# EAGLE board teensyMotors (EAGLE 9.1.3)
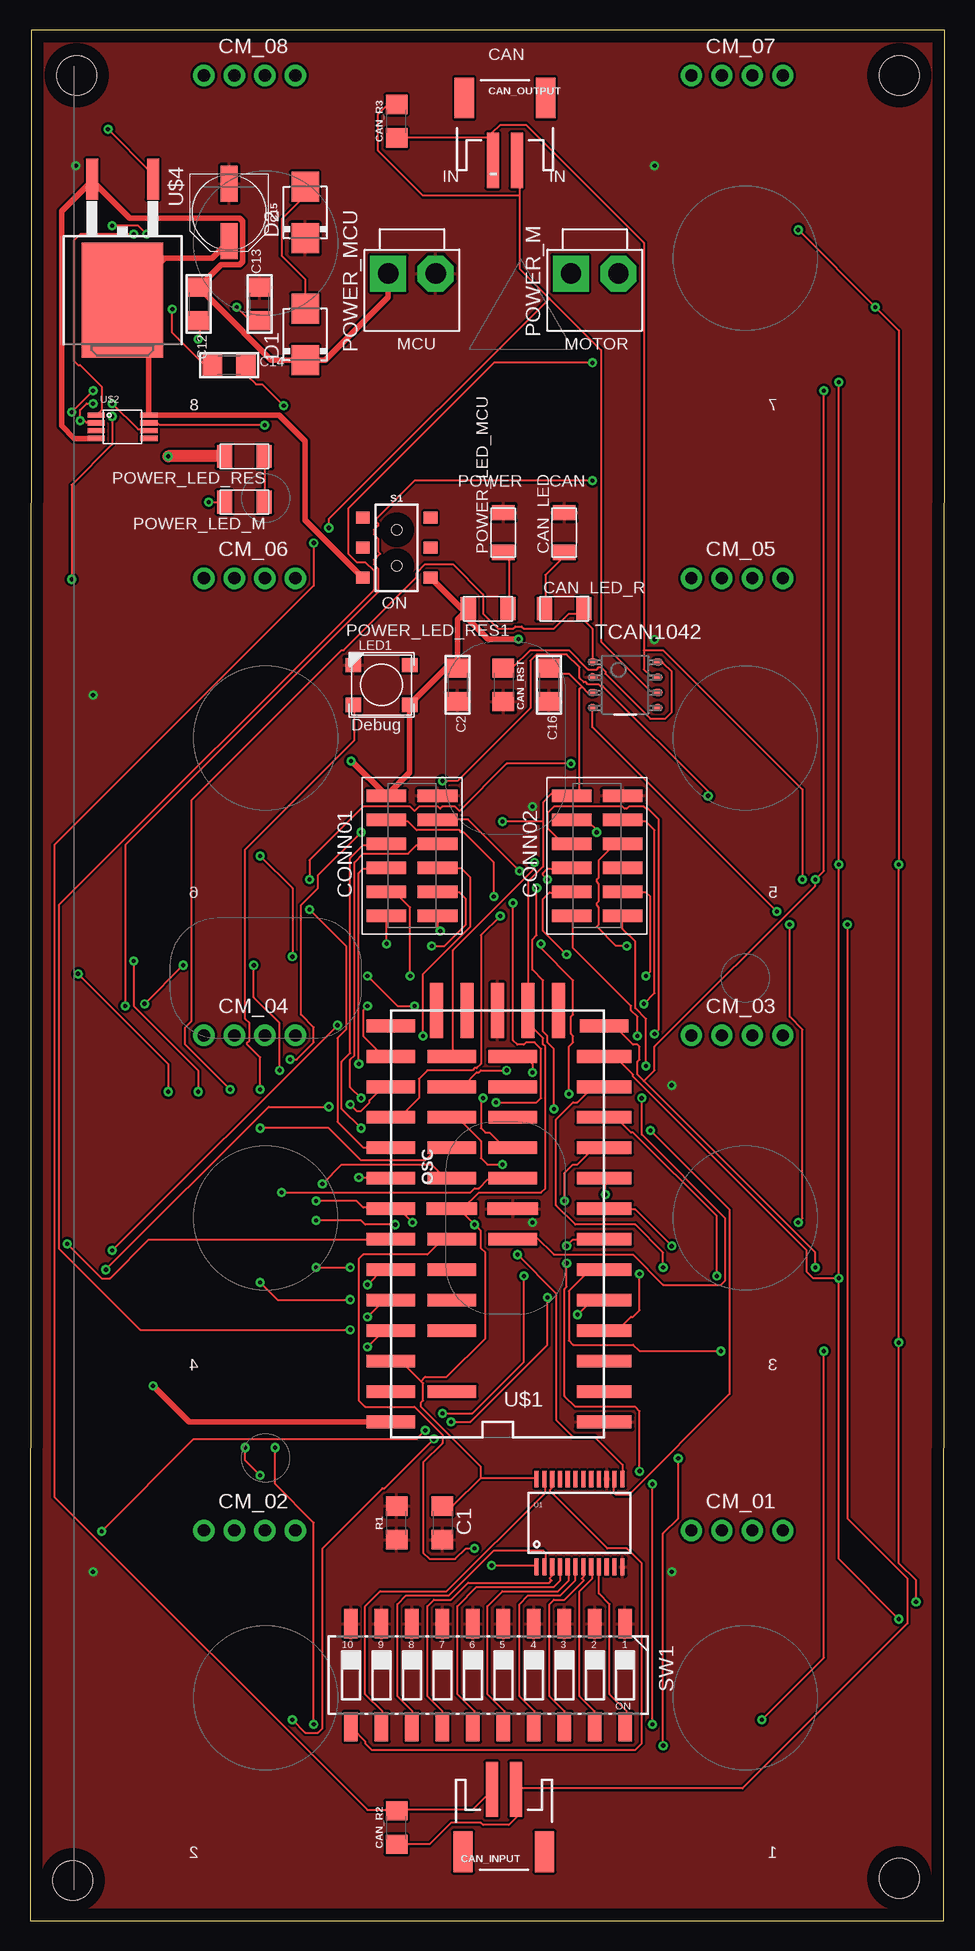
[diagram p0: board, top side]
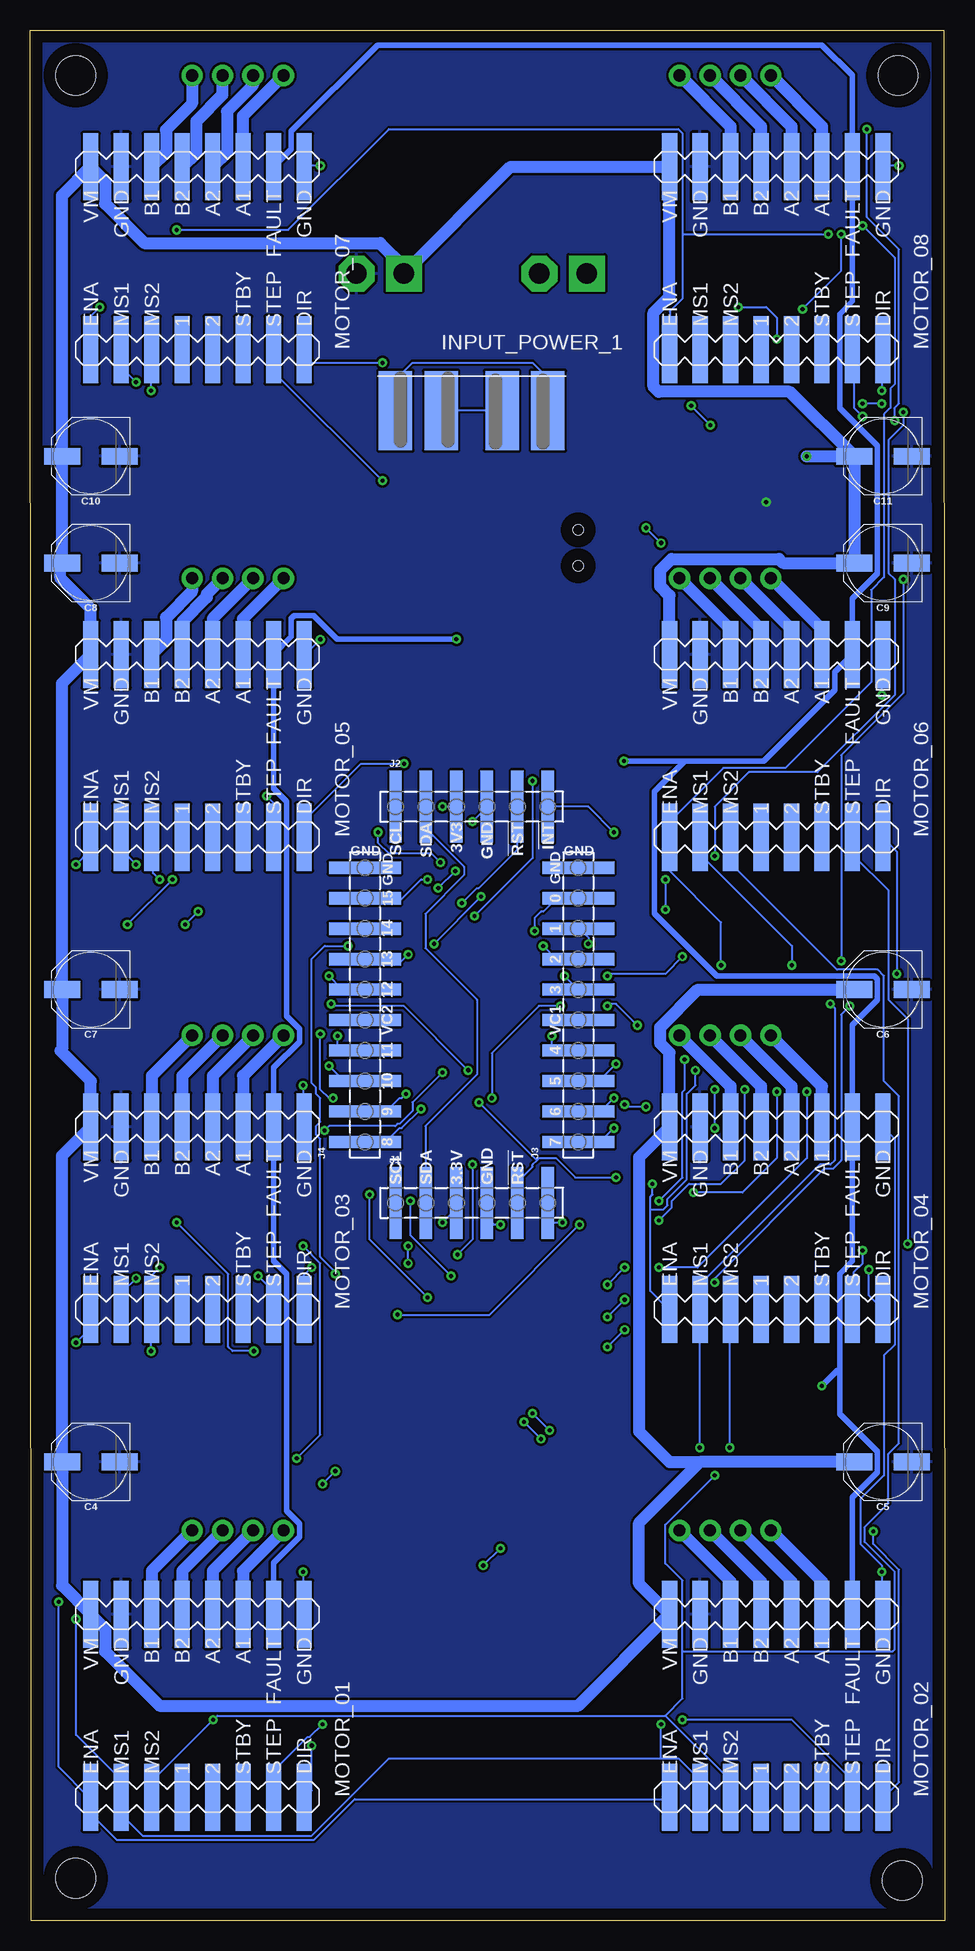
[diagram p1: board, bottom side, seen from below]

Size 76.28 x 157.61 mm. Coordinates in mm from the lower left corner, seen from the top.
Outline: 0,0 76.19,0 76.28,157.61 0.09,157.61 0,0
Copper layers (1*16): Top 0.035mm / dielectric 1.5mm / Bottom 0.035mm
Design rules "teensyMotors *": minimum track width 0.2mm, minimum drill 0.35mm, track to track 0.205mm, track to pad 0.205mm, pad to pad 0.205mm, via to via 0.205mm, smd to smd 6mil, copper to edge 40mil, drill to drill 6mil, minimum pad ring 10mil, minimum via ring 8mil, stop-mask expansion 4mil, vias tented up to drill 0mil, thermal gap 10mil
Net classes: 0 default: clearance 0.205 mm; 1 20z: width 2 mm

## Footprints (pad centres in the part's own frame; a part is rotated, then mirrored left to right if it is on the bottom)
C1206 = smd 1.6 x 1.8: 1 -1.4,0; 2 1.4,0
1206 = smd 1.6 x 1.8: 1 -1.4,0; 2 1.4,0
PANASONIC_D = smd 3 x 1.4: + 2.4,0; - -2.4,0
JST-2-SMD = smd 1 x 4.6: 1 -1,-3.7; 2 1,-3.7 | smd 1.6 x 3.4: NC1 -3.4,1.5; NC2 3.4,1.5
LED1206FAB = smd 1.27 x 1.905: 1 -1.651,0; 2 1.651,0
R1206FAB = smd 1.27 x 1.905: 1 -1.651,0; 2 1.651,0
1X04-CLEANBIG = drill 1.016 pad 1.778: 1 -3.81,0; 2 -1.27,0; 3 1.27,0; 4 3.81,0
TMMH-105-12 = smd 1.016 x 3.302: 1 -5.27,-2.134; 2 -5.27,2.134; 3 -3.27,-2.134; 4 -3.27,2.134; 5 -1.27,-2.134; 6 -1.27,2.134; 7 0.73,-2.134; 8 0.73,2.134; 9 2.73,-2.134; 10 2.73,2.134; 11 4.73,2.134; 12 4.73,-2.134
DO214AA = smd 2.5 x 2.3: A 2.15,0; C -2.15,0
MOLEX4015 = smd 2.794 x 6.604: GND_01 -2.54,3.81; GND_02 2.54,3.81; VCC_01 -6.35,3.81; VCC_02 6.35,3.81
1X06_SMD_MALE = smd 1.02 x 6: 1 0,0; 2 2.54,0; 3 5.08,0; 4 7.62,0; 5 10.16,0; 6 12.7,0
1X10_SMD_MALE = smd 1.02 x 6: 1 0,0; 2 2.54,0; 3 5.08,0; 4 7.62,0; 5 10.16,0; 6 12.7,0; 7 15.24,0; 8 17.78,0; 9 20.32,0; 10 22.86,0
LED5050_N = smd 1.3 x 1.2: 1-VDD 2.35,-1.65; 2-DOUT 2.35,1.65; 3-GND -2.35,1.65; 4-DIN -2.35,-1.65
DRV8880 = smd 5.588 x 1.27: 1 -7.62,1.27; 2 -7.62,-1.27; A1 7.62,-3.81; A2 7.62,-1.27; B1 7.62,3.81; B2 7.62,1.27; DIR -7.62,-8.89; ENA -7.62,8.89; FAULT 7.62,-6.35; GND_0 7.62,-8.89; GND_1 7.62,6.35; MS1 -7.62,6.35; MS2 -7.62,3.81; STBY -7.62,-3.81; STEP -7.62,-6.35; VM 7.62,8.89
B2P-VH = drill 1.7 pad 3 square: 1 -1.98,0 | drill 1.7 pad 3 octagon: 2 1.98,0
SWITCH_DPDT_SMD_AYZ0202 = smd 1 x 1.15: 1 -2.5,2.825; 2 0,2.825; 3 2.5,2.825; 4 -2.5,-2.825; 5 0,-2.825; 6 2.5,-2.825 | hole 0.85: 1.5,0; -1.5,0
STAND-OFF = hole 3.302: 0,0
CTS-219-10 = smd 1.13 x 2.44: 1 -11.43,-4.3; 2 -8.89,-4.3; 3 -6.35,-4.3; 4 -3.81,-4.3; 5 -1.27,-4.3; 6 1.27,-4.3; 7 3.81,-4.3; 8 6.35,-4.3; 9 8.89,-4.3; 10 11.43,-4.3; 11 11.43,4.3; 12 8.89,4.3; 13 6.35,4.3; 14 3.81,4.3; 15 1.27,4.3; 16 -1.27,4.3; 17 -3.81,4.3; 18 -6.35,4.3; 19 -8.89,4.3; 20 -11.43,4.3
D0008A_N = smd 0.85 x 0.6: 1 -2.725,1.905; 2 -2.725,0.635; 3 -2.725,-0.635; 4 -2.725,-1.905; 5 2.725,-1.905; 6 2.725,-0.635; 7 2.725,0.635; 8 2.725,1.905
SSOP24 = smd 0.348 x 1.397: 1 -3.575,-3.656; 2 -2.925,-3.656; 3 -2.275,-3.656; 4 -1.625,-3.656; 5 -0.975,-3.656; 6 -0.325,-3.656; 7 0.325,-3.656; 8 0.975,-3.656; 9 1.625,-3.656; 10 2.275,-3.656; 11 2.925,-3.656; 12 3.575,-3.656; 13 3.575,3.656; 14 2.925,3.656; 15 2.275,3.656; 16 1.625,3.656; 17 0.975,3.656; 18 0.325,3.656; 19 -0.325,3.656; 20 -0.975,3.656; 21 -1.625,3.656; 22 -2.275,3.656; 23 -2.925,3.656; 24 -3.575,3.656
TEENSY_3.0-3.2_ALL_PINS_&_PADS_SMD = smd 4.572 x 1.067: 0 -8.89,13.97; 1 -8.89,11.43; 2 -8.89,8.89; 3 -8.89,6.35; 4 -8.89,3.81; 5 -8.89,1.27; 6 -8.89,-1.27; 7 -8.89,-3.81; 8 -8.89,-6.35; 9 -8.89,-8.89; 10 -8.89,-11.43; 11 -8.89,-13.97; GND -8.89,16.51 | smd 4.064 x 1.067: 3.3V 8.89,11.43; 12 -8.89,-16.51; 13 8.89,-16.51; 14/A0 8.89,-13.97; 15/A1 8.89,-11.43; 16/A2 8.89,-8.89; 17/A3 8.89,-6.35; 18/A4 8.89,-3.81; 19/A5 8.89,-1.27; 20/A6 8.89,1.27; 21/A7 8.89,3.81; 22/A8 8.89,6.35; 23/A9 8.89,8.89; 24 -1.27,-3.81; 25 -1.27,-6.35; 26 -1.27,-8.89; 27 -1.27,-11.43; 28 -1.27,-13.97; 29 3.81,-13.97; 30 3.81,-11.43; 31 3.81,-8.89; 32 3.81,-6.35; 33 3.81,-3.81; A10 3.81,6.35; A11 3.81,3.81; A12 -1.27,1.27; A13 3.81,1.27; AGND 8.89,13.97; AREF 3.81,8.89; VIN 8.89,16.51; VUSB 3.81,13.97 | smd 1.067 x 4.572: 3.3V1 -2.54,-17.78; GND1 0,-17.78; PGM 2.54,-17.78; RESET/DAC 5.08,-17.78; VBAT -5.08,-17.78 | smd 4.191 x 1.067: 3.3V2 3.81,-1.27; GND2 -1.27,-1.27
VSSOP(8) = smd 1.435 x 0.445: ANODE -2.2,-1.05; CATHODE 2.2,0.9; GDRIVE 2.2,-0.4; GPD -2.2,0.25; NC@1 -2.2,-0.4; NC@2 2.2,-1.05; VCAPH 2.2,0.25; VCAPL -2.2,0.9
TO263-3 = smd 1 x 3.4: 1 -2.54,-9.14; 3 2.54,-9.14 | smd 6.8 x 9.6: 4 0,0.96

## Placement (x,y rotation side)
C1  0.1uF  [C1206]  34.38,33.17 270 top
C2  [1206]  35.65,103.02 270 top
C4  100uF  [PANASONIC_D]  71.21,38.25 180 bottom
C5  100uF  [PANASONIC_D]  5.17,38.25 180 bottom
C6  100uF  [PANASONIC_D]  5.17,77.62 180 bottom
C7  100uF  [PANASONIC_D]  71.21,77.62 180 bottom
C8  100uF  [PANASONIC_D]  71.21,113.18 180 bottom
C9  100uF  [PANASONIC_D]  5.17,113.18 180 bottom
C10  100uF  [PANASONIC_D]  71.21,122.07 180 bottom
C11  100uF  [PANASONIC_D]  5.17,122.07 180 bottom
C12  [1206]  14.06,134.77 270 top
C13  [1206]  19.14,134.77 90 top
C14  [1206]  16.6,129.69 0 top
C15  100uF  [PANASONIC_D]  16.6,142.39 270 top
C16  [1206]  43.27,103.02 270 top
CAN_INPUT  [JST-2-SMD]  39.5,7.25 180 top
CAN_LED  LEDFAB1206  [LED1206FAB]  44.54,115.72 90 top
CAN_LED_R  500  [R1206FAB]  44.54,109.37 0 top
CAN_OUTPUT  [JST-2-SMD]  39.6,150.44 0 top
CAN_R2  120ohm  [1206]  30.57,7.77 90 top
CAN_R3  120ohm  [1206]  30.57,150.01 90 top
CAN_RST  10K  [1206]  39.46,103.02 270 top
CM_01  1X04_SMD_STRAIGHT_COMBO  [1X04-CLEANBIG]  58.96,32.53 0 top
CM_02  1X04_SMD_STRAIGHT_COMBO  [1X04-CLEANBIG]  18.32,32.53 0 top
CM_03  1X04_SMD_STRAIGHT_COMBO  [1X04-CLEANBIG]  58.96,73.81 0 top
CM_04  1X04_SMD_STRAIGHT_COMBO  [1X04-CLEANBIG]  18.32,73.81 0 top
CM_05  1X04_SMD_STRAIGHT_COMBO  [1X04-CLEANBIG]  58.96,111.91 0 top
CM_06  1X04_SMD_STRAIGHT_COMBO  [1X04-CLEANBIG]  18.32,111.91 0 top
CM_07  1X04_SMD_STRAIGHT_COMBO  [1X04-CLEANBIG]  58.96,153.82 0 top
CM_08  1X04_SMD_STRAIGHT_COMBO  [1X04-CLEANBIG]  18.32,153.82 0 top
CONN01  TMMH-105-12  [TMMH-105-12]  31.84,89.05 90 top
CONN02  TMMH-105-12  [TMMH-105-12]  47.29,89.05 90 top
D1  S2M  [DO214AA]  22.95,132.23 90 top
D2  S2M  [DO214AA]  22.95,142.39 90 top
INPUT_POWER_1  MOLEX4015  [MOLEX4015]  39.46,122.07 0 bottom
J1  [1X06_SMD_MALE]  45.81,59.84 0 bottom
J2  [1X06_SMD_MALE]  45.81,92.86 0 bottom
J3  [1X10_SMD_MALE]  30.57,64.92 90 bottom
J4  [1X10_SMD_MALE]  48.35,64.92 90 bottom
LED1  [LED5050_N]  29.3,103.02 0 top
MOTOR_01  DRV8880  [DRV8880]  62.32,17.93 90 bottom
MOTOR_02  DRV8880  [DRV8880]  14.06,17.93 90 bottom
MOTOR_03  DRV8880  [DRV8880]  62.32,58.57 90 bottom
MOTOR_04  DRV8880  [DRV8880]  14.06,58.57 90 bottom
MOTOR_05  DRV8880  [DRV8880]  62.32,97.94 90 bottom
MOTOR_06  DRV8880  [DRV8880]  14.06,97.94 90 bottom
MOTOR_07  DRV8880  [DRV8880]  62.32,138.58 90 bottom
MOTOR_08  DRV8880  [DRV8880]  14.06,138.58 90 bottom
POWER_LED_M  LEDFAB1206  [LED1206FAB]  17.87,118.26 180 top
POWER_LED_MCU  LEDFAB1206  [LED1206FAB]  39.46,115.72 90 top
POWER_LED_RES  500  [R1206FAB]  17.87,122.07 180 top
POWER_LED_RES1  500  [R1206FAB]  38.19,109.37 180 top
POWER_M  B2P-VH  [B2P-VH]  47.08,137.31 0 top
POWER_MCU  B2P-VH  [B2P-VH]  31.84,137.31 0 top
R1  [1206]  30.57,33.17 90 top
S1  [SWITCH_DPDT_SMD_AYZ0202]  30.57,114.45 270 top
STANDOFF5  STAND-OFF  [STAND-OFF]  72.48,3.53 0 top
STANDOFF6  STAND-OFF  [STAND-OFF]  3.57,3.36 0 top
STANDOFF7  STAND-OFF  [STAND-OFF]  72.48,153.82 0 top
STANDOFF8  STAND-OFF  [STAND-OFF]  3.9,153.82 0 top
SW1  219-10  [CTS-219-10]  38.19,20.47 180 top
TCAN1042  Value  [D0008A_N]  49.62,103.02 0 top
U1  MUX-74HC4067  [SSOP24]  45.81,33.17 0 top
U$1  TEENSY_3.1-3.2_ALL_PINS&PADS_SMD  [TEENSY_3.0-3.2_ALL_PINS_&_PADS_SMD]  38.98,58.08 180 top
U$2  [VSSOP(8)]  7.71,124.61 0 top
U$4  [TO263-3]  7.71,136.04 180 top

## Library data of the parts
C1 CM_01-CM_08 = adafruit
C2 C12-C14 C16 = microbuilder
C4-C11 C15 = SparkFun-Capacitors; PROD_ID: CAP-12547
CAN_INPUT CAN_OUTPUT = SparkFun-Connectors; PROD_ID: CONN-11443
CAN_LED CAN_LED_R POWER_LED_M POWER_LED_MCU POWER_LED_RES POWER_LED_RES1 = fab
CAN_R2 CAN_R3 CAN_RST R1 = SparkFun-Resistors
CONN01 CONN02 = TMMH-105-XX-XX-DV
D1 D2 = s2x_10; MF: Fairchild; MPN: S2M; OC_FARNELL: 9843876; OC_NEWARK: 58K9553
INPUT_POWER_1 = MOLEX4015
J1 J2 = SparkFun-Connectors; PROD_ID: CONN-11293
J3 J4 = SparkFun-Connectors; PROD_ID: CONN-11291
LED1 = SK6812
MOTOR_01-MOTOR_08 = STSPIN220
POWER_M POWER_MCU = con-JST VH
S1 = SparkFun-Switches; PROD_ID: SWCH-08179; SF_SKU: COM-00597; SPICEPREFIX: X
STANDOFF5-STANDOFF8 = SparkFun-Electromechanical
SW1 = switch-dil; MF: SLI (CML/IDI); MPN: 219-10PK; OC_FARNELL: unknown; OC_NEWARK: 19M0224
TCAN1042 = TCAN1042DRQ1; MANUFACTURER: Texas Instruments; PARTNUMBER: TCAN1042DRQ1; REFDES: RefDes; TYPE: TYPE
U1 = SparkFun
U$1 = Teensy_3_and_LC_Series_Boards_v1.4
U$2 = 1zac; MPN: LM74610-Q1
U$4 = v-reg-2

## Nets
3.3V: C1.1 C16.1 CONN02.11 J1.4 J2.4 TCAN1042.3 U1.24 U$1.3.3V U$1.3.3V1 U$1.3.3V2
AGND: U$1.AGND
AREF: U$1.AREF
C0: SW1.20 U1.9
C1: SW1.19 U1.8
C2: SW1.18 U1.7
C3: SW1.17 U1.6
C4: SW1.16 U1.5
C5: SW1.15 U1.4
C6: SW1.14 U1.3
C7: SW1.13 U1.2
C8: SW1.12 U1.23
C9: SW1.11 U1.22
CAN_H: CAN_INPUT.1 CAN_OUTPUT.1 CAN_R2.1 CAN_R3.1 TCAN1042.7
CAN_L: CAN_INPUT.2 CAN_OUTPUT.2 CAN_R2.2 CAN_R3.2 TCAN1042.6
CAN_RX [20z]: TCAN1042.4 U$1.4
CAN_TX [20z]: CAN_LED_R.2 TCAN1042.1 U$1.3
GND_IN: INPUT_POWER_1.GND_01 INPUT_POWER_1.GND_02
GND_M: C4.- C5.- C6.- C7.- C8.- C9.- C10.- C11.- MOTOR_01.GND_1 MOTOR_02.GND_1 MOTOR_03.GND_1 MOTOR_04.GND_1 MOTOR_05.GND_1 MOTOR_06.GND_1 MOTOR_07.GND_1 MOTOR_08.GND_1 POWER_LED_M.2 POWER_M.2
GND_MCU: C1.2 C2.2 C13.2 C15.- C16.2 CAN_LED.2 CAN_RST.2 CONN01.12 CONN02.12 D2.C J1.3 J2.3 LED1.3-GND MOTOR_01.GND_0 MOTOR_02.GND_0 MOTOR_03.GND_0 MOTOR_04.GND_0 MOTOR_05.GND_0 MOTOR_06.GND_0 MOTOR_07.GND_0 MOTOR_08.GND_0 POWER_LED_MCU.2 POWER_MCU.2 R1.1 R1.2 SW1.1 SW1.2 SW1.3 SW1.4 SW1.5 SW1.6 SW1.7 SW1.8 SW1.9 SW1.10 TCAN1042.2 U1.12 U1.15 U$1.GND U$1.GND1 U$1.GND2
I2CM_0: CONN01.1 J3.9
I2CM_1: CONN01.2 J3.8
I2CM_2: CONN01.3 J3.7
I2CM_3: CONN01.4 J3.6
I2CM_4: CONN01.5 J3.4
I2CM_5: CONN01.6 J3.3
I2CM_6: CONN01.7 J3.2
I2CM_7: CONN01.8 J3.1
I2CM_8: CONN01.9 J4.1
I2CM_9: CONN01.10 J4.2
I2CM_10: CONN02.1 J4.3
I2CM_11: CONN02.2 J4.4
I2CM_12: CONN02.3 J4.6
I2CM_13: CONN02.4 J4.7
I2CM_14: J4.8
I2CM_15: CONN02.6 J4.9
IC2M_14: CONN02.5
LED_DEBUG: LED1.4-DIN U$1.32
MA1_01: CM_01.1 MOTOR_01.A1
MA1_02: CM_02.1 MOTOR_02.A1
MA1_03: CM_03.1 MOTOR_03.A1
MA1_04: CM_04.1 MOTOR_04.A1
MA1_05: CM_05.1 MOTOR_05.A1
MA1_06: CM_06.1 MOTOR_06.A1
MA1_07: CM_07.1 MOTOR_07.A1
MA1_08: CM_08.1 MOTOR_08.A1
MA2_01: CM_01.2 MOTOR_01.A2
MA2_02: CM_02.2 MOTOR_02.A2
MA2_03: CM_03.2 MOTOR_03.A2
MA2_04: CM_04.2 MOTOR_04.A2
MA2_05: CM_05.2 MOTOR_05.A2
MA2_06: CM_06.2 MOTOR_06.A2
MA2_07: CM_07.2 MOTOR_07.A2
MA2_08: CM_08.2 MOTOR_08.A2
MB1_01: CM_01.4 MOTOR_01.B1
MB1_02: CM_02.4 MOTOR_02.B1
MB1_03: CM_03.4 MOTOR_03.B1
MB1_04: CM_04.4 MOTOR_04.B1
MB1_05: CM_05.4 MOTOR_05.B1
MB1_06: CM_06.4 MOTOR_06.B1
MB1_07: CM_07.4 MOTOR_07.B1
MB1_08: CM_08.4 MOTOR_08.B1
MB2_01: CM_01.3 MOTOR_01.B2
MB2_02: CM_02.3 MOTOR_02.B2
MB2_03: CM_03.3 MOTOR_03.B2
MB2_04: CM_04.3 MOTOR_04.B2
MB2_05: CM_05.3 MOTOR_05.B2
MB2_06: CM_06.3 MOTOR_06.B2
MB2_07: CM_07.3 MOTOR_07.B2
MB2_08: CM_08.3 MOTOR_08.B2
MDIR_01 [20z]: MOTOR_01.DIR U$1.6
MDIR_02 [20z]: MOTOR_02.DIR U$1.8
MDIR_03 [20z]: MOTOR_03.DIR U$1.10
MDIR_04 [20z]: MOTOR_04.DIR U$1.15/A1
MDIR_05 [20z]: MOTOR_05.DIR U$1.17/A3
MDIR_06 [20z]: MOTOR_06.DIR U$1.21/A7
MDIR_07 [20z]: MOTOR_07.DIR U$1.23/A9
MDIR_08: MOTOR_08.DIR U$1.25
MENABLE: MOTOR_01.ENA MOTOR_02.ENA MOTOR_03.ENA MOTOR_04.ENA MOTOR_05.ENA MOTOR_06.ENA MOTOR_07.ENA MOTOR_08.ENA U$1.33
MMS1 [20z]: MOTOR_01.MS1 MOTOR_02.MS1 MOTOR_03.MS1 MOTOR_04.MS1 MOTOR_05.MS1 MOTOR_06.MS1 MOTOR_07.MS1 U$1.11
MMS2 [20z]: MOTOR_01.MS2 MOTOR_02.MS2 MOTOR_03.MS2 MOTOR_04.MS2 MOTOR_05.MS2 MOTOR_06.MS2 MOTOR_07.MS2 U$1.12
MSS1: MOTOR_08.MS1
MSS2: MOTOR_08.MS2
MSTEP_01 [20z]: MOTOR_01.STEP U$1.5
MSTEP_02 [20z]: MOTOR_02.STEP U$1.7
MSTEP_03 [20z]: MOTOR_03.STEP U$1.9
MSTEP_04 [20z]: MOTOR_04.STEP U$1.14/A0
MSTEP_05 [20z]: MOTOR_05.STEP U$1.16/A2
MSTEP_06 [20z]: MOTOR_06.STEP U$1.20/A6
MSTEP_07 [20z]: MOTOR_07.STEP U$1.22/A8
MSTEP_08 [20z]: MOTOR_08.STEP U$1.24
MUS_S1: U1.11
MUX_INT: J1.1
MUX_OSCIO: J2.1
MUX_RESET: J1.2 J2.2
MUX_S0: U$1.26
MUX_S1: U$1.27
MUX_S2: U1.14 U$1.28
MUX_S3: U1.13 U$1.31
MUX_SCL [20z]: J1.6 J2.6 U$1.19/A5
MUX_SDA [20z]: J1.5 J2.5 U$1.18/A4
MUX_SIG [20z]: U1.1 U$1.A13
MUX_SO: U1.10
N$1: POWER_LED_M.1 POWER_LED_RES.1
N$2: C14.2 U$2.VCAPH
N$3: TCAN1042.5
N$4: U$2.GDRIVE U$2.GPD U$4.1
N$5: C14.1 U$2.VCAPL
N$6: CAN_RST.1 TCAN1042.8
N$7: POWER_LED_MCU.1 POWER_LED_RES1.1
N$9: C12.2 C13.1
N$11: U$1.13
N$12: D1.A D2.A
N$13: LED1.2-DOUT
N$193: CAN_LED.1 CAN_LED_R.1
NEO_PIXEL [20z]: CONN02.7 U$1.2
REG_5V: C15.+ S1.6 U$2.CATHODE U$4.4
S_SCL: CONN02.10 U$1.29
S_SDA: CONN02.9 U$1.30
S_SEN_01: CONN02.8 U$1.A12
VBAT: U$1.VBAT
VCC1: J3.5
VCC2: J4.5
VCC_5V: C2.1 CONN01.11 LED1.1-VDD MOTOR_01.FAULT MOTOR_02.FAULT MOTOR_03.FAULT MOTOR_04.FAULT MOTOR_05.FAULT MOTOR_06.FAULT MOTOR_07.FAULT MOTOR_08.FAULT POWER_LED_RES1.2 S1.3 U$1.VIN
VCC_IN: INPUT_POWER_1.VCC_01 INPUT_POWER_1.VCC_02
VCC_M: C4.+ C5.+ C6.+ C7.+ C8.+ C9.+ C10.+ C11.+ MOTOR_01.VM MOTOR_02.VM MOTOR_03.VM MOTOR_04.VM MOTOR_05.VM MOTOR_06.VM MOTOR_07.VM MOTOR_08.VM POWER_LED_RES.2 POWER_M.1
VCC_MCU: C12.1 D1.C POWER_MCU.1 U$2.ANODE U$4.3
VUSB: U$1.VUSB

## Tracks (layer width: path | path; a pad name or v marks a point on that pad's centre or on a via)
3.3V  (via drill 0.35)
  Top 0.152: 46,102.88 44.93,103.95 43.68,103.95 43.32,104.31 C16.1 | 46,102.88 46.54,102.34 46.89,102.34 TCAN1042.3 | 46,102.88 45.82,102.7 45.82,94.3 45.29,93.77 CONN02.11 45.11,93.94 43.5,93.94 42.78,93.23 42.78,91.62 | 42.78,91.62 42.78,87.87 41.53,86.62 41.53,75.9 U$1.3.3V1 41.53,75.72 41.53,74.82 42.78,73.57 42.78,73.04 42.96,72.86 42.96,61.07 42.61,60.71 37.42,60.71 35.99,59.28 35.81,59.28 | 42.78,91.62 v39.39,91.62 | 35.81,59.28 35.28,59.28 U$1.3.3V2 35.81,59.28 | 35.81,59.28 v37.07,58.03 37.6,57.49 37.6,56.06 37.96,55.7 37.96,48.56 34.74,45.34 32.96,45.34 32.6,44.98 | 37.6,36.94 42.07,36.94 U1.24 | 37.6,36.94 35.28,34.62 34.38,34.62 C1.1 | 32.6,44.98 32.78,44.8 32.78,43.37 32.6,43.2 32.6,42.84 37.6,37.83 37.6,36.94 | 32.6,44.98 30.99,46.59 30.1,46.59 U$1.3.3V
  Bottom 0.152: v39.39,91.62 38.32,92.69 J2.4 | v37.07,58.03 37.6,58.03 38.14,58.56 38.14,59.81 J1.4
C0
  Top 0.152: U1.9 47.43,29.43 47.43,27.29 48.32,26.4 48.32,18.89 49.75,17.46 49.75,16.21 SW1.20
C1
  Top 0.152: U1.8 46.89,29.43 46.89,28.54 45.82,27.47 45.82,18.71 47.07,17.46 47.07,16.21 SW1.19
C2
  Top 0.152: U1.7 46.18,29.43 46.18,28.72 46,28.54 46.18,28.36 44.57,26.75 43.68,26.75 43.32,26.4 43.32,18.71 44.57,17.46 44.57,16.21 SW1.18
C3
  Top 0.152: U1.6 45.46,29.43 45.46,28.36 44.21,27.11 41.53,27.11 40.82,26.4 40.82,18.71 42.07,17.46 42.07,16.21 SW1.17
C4
  Top 0.152: U1.5 44.93,29.43 44.93,28.36 44.03,27.47 39.39,27.47 38.14,26.22 38.14,18.89 39.57,17.46 39.57,16.21 SW1.16
C5
  Top 0.152: U1.4 44.21,29.43 44.21,28.36 43.68,27.83 37.24,27.83 35.64,26.22 35.64,18.89 37.07,17.46 37.07,16.21 SW1.15
C6
  Top 0.152: U1.3 43.5,29.43 43.5,28.72 43.32,28.54 43.5,28.36 43.32,28.18 36.53,28.18 35.1,26.75 33.67,26.75 33.13,26.22 33.13,18.71 34.38,17.46 34.38,16.21 SW1.14
C7
  Top 0.152: U1.2 42.96,29.61 42.96,30.69 42.78,30.86 38.67,30.86 34.92,27.11 31.35,27.11 30.63,26.4 30.63,18.71 31.88,17.46 31.88,16.21 SW1.13
C8
  Top 0.152: U1.23 42.96,36.76 42.96,35.69 34.74,27.47 29.2,27.47 27.95,26.22 27.95,18.89 29.38,17.46 29.38,16.21 SW1.12
C9
  Top 0.152: U1.22 43.5,36.76 43.5,36.05 43.32,35.87 48.14,31.04 49.75,31.04 51,29.79 51,14.78 50.47,14.25 28.49,14.25 27.95,14.78 27.95,14.96 26.88,16.03 SW1.11
CAN_H  (via drill 0.35)
  Top 0.152: CAN_R2.1 30.63,6.38 33.31,6.38 35.1,8.17 37.6,8.17 37.78,7.99 39.92,7.99 40.64,8.71 40.64,10.85 CAN_INPUT.1 40.64,11.03 59.4,11.03 73.16,24.79 73.16,28.54 68.16,33.55 v68.16,83.05 | 51.18,105.92 51.18,139.87 41.35,149.7 39.21,149.7 38.49,148.99 38.49,148.63 | 51.18,105.92 51.18,104.31 51.72,103.77 52.25,103.77 TCAN1042.7 | 38.49,148.63 38.49,146.84 CAN_OUTPUT.1 38.49,148.63 | 38.49,148.63 30.63,148.63 CAN_R3.1 | v64.41,86.8 64.41,94.3 52.79,105.92 51.18,105.92
  Bottom 0.152: v64.41,86.8 v68.16,83.05
CAN_L  (via drill 0.35)
  Top 0.152: CAN_INPUT.2 38.49,10.85 36.89,9.24 30.63,9.24 CAN_R2.2 30.45,9.24 28.13,9.24 2.04,35.33 2.04,89.66 23.66,111.28 v23.66,114.85 | 43.32,135.23 40.82,137.73 40.82,143.8 | 43.32,135.23 47.61,130.94 47.61,106.63 51.72,102.52 52.25,102.52 TCAN1042.6 | 40.82,143.8 40.82,146.48 40.64,146.66 CAN_OUTPUT.2 | 40.82,143.8 32.78,143.8 29.02,147.56 29.02,150.59 29.74,151.31 30.45,151.31 CAN_R3.2 | v24.91,116.1 24.91,116.82 43.32,135.23
  Bottom 0.152: v24.91,116.1 v23.66,114.85
CAN_RX  (via drill 0.35)
  Top 0.152: v62.26,84.12 46.89,99.48 46.89,101.09 TCAN1042.4 | v63.33,83.05 63.33,75.36 64.41,74.29 64.41,58.56 v64.05,58.21 | v57.62,47.48 50.83,47.48 50.29,48.02 45.29,48.02 44.93,48.38 44.93,52.49 46.72,54.27 47.79,54.27 U$1.4
  Bottom 0.152: v63.33,83.05 v62.26,84.12 | v64.05,58.21 59.76,53.92 59.76,47.84 59.4,47.48 v57.62,47.48
CAN_TX  (via drill 0.35)
  Top 0.152: 46.18,108.96 46.18,109.31 CAN_LED_R.2 46.18,108.96 | 46.18,108.96 46.18,108.42 46.89,107.7 46.89,105.02 TCAN1042.1 | 46.18,108.96 44.93,108.96 43.68,107.7 41.18,107.7 41,107.88 40.46,107.88 40.28,107.7 39.03,107.7 37.78,108.96 37.78,110.56 35.28,113.07 32.96,113.07 32.24,112.35 32.24,111.99 26.17,105.92 25.99,105.92 13.48,93.41 13.48,75 12.94,74.47 12.94,73.04 v16.69,69.28 | v23.84,58.38 27.6,58.38 27.95,58.03 v30.45,58.03 | v45.64,50.52 46.72,51.59 47.79,51.59 U$1.3
  Bottom 0.152: v16.69,69.28 16.69,63.39 18.66,61.42 21.34,61.42 22.77,59.99 22.77,59.46 v23.84,58.38 | v30.45,58.03 37.96,50.52 v45.64,50.52
GND_IN
  Bottom 0.152: INPUT_POWER_1.GND_02 37.07,125.93 41.89,125.93 INPUT_POWER_1.GND_01
GND_M  (via drill 0.35)
  Top 0.152: v14.91,118.25 16.16,118.25 POWER_LED_M.2
  pour Bottom: -3.72,160.17 80.1,160.17 80.1,-2.39 -3.72,-2.39
GND_MCU  (via drill 0.35)
  Bottom 0.152: MOTOR_02.GND_0 5.26,25.68 v5.26,29.08 5.26,29.61 7.04,31.4 7.04,35.15 5.08,37.12 5.08,47.13 4.18,48.02 4.18,65.17 5.08,66.07 MOTOR_04.GND_0 | v53.51,29.08 53.51,25.68 MOTOR_01.GND_0 | v5.26,102.17 5.26,105.38 MOTOR_06.GND_0 | v53.51,69.64 53.51,66.25 MOTOR_03.GND_0 | v3.83,146.31 5.08,146.31 MOTOR_08.GND_0 | v52.08,106.81 53.33,105.56 MOTOR_05.GND_0 | v52.08,146.31 53.33,146.31 MOTOR_07.GND_0 | v41.89,58.21 40.82,59.28 40.82,59.81 J1.3 | v41.89,92.87 40.82,92.87 J2.3
  pour Top: -3.72,160.17 80.1,160.17 80.1,-2.39 -2.45,-2.39 -3.72,-1.12
I2CM_0  (via drill 0.35)
  Top 0.152: v34.21,82.51 34.03,82.69 34.03,83.76 CONN01.1
  Bottom 0.152: v34.21,82.51 34.21,83.58 33.67,84.12 33.49,84.12 32.42,85.19 30.63,85.19 J3.9
I2CM_1  (via drill 0.35)
  Top 0.152: v29.74,81.44 29.74,83.76 CONN01.2
  Bottom 0.152: v29.74,81.44 29.74,81.97 30.45,82.69 J3.8
I2CM_2  (via drill 0.35)
  Top 0.152: v33.49,81.26 34.56,81.26 36.35,83.05 36.35,85.19 35.81,85.72 34.03,85.72 CONN01.3
  Bottom 0.152: v33.49,81.26 32.42,80.19 30.63,80.19 J3.7
I2CM_3  (via drill 0.35)
  Top 0.152: v31.71,78.76 31.71,84.47 30.45,85.72 29.74,85.72 CONN01.4
  Bottom 0.152: v31.71,78.76 30.63,77.68 J3.6
I2CM_4  (via drill 0.35)
  Top 0.152: v32.78,73.75 32.78,78.94 36.71,82.87 36.71,86.98 35.99,87.69 34.03,87.69 CONN01.5
  Bottom 0.152: v32.78,73.75 32.78,73.04 32.42,72.68 30.63,72.68 J3.4
I2CM_5  (via drill 0.35)
  Top 0.152: v27.42,71.43 27.42,87.33 27.77,87.69 29.56,87.69 CONN01.6
  Bottom 0.152: v27.42,71.43 28.85,70 30.45,70 J3.3
I2CM_6  (via drill 0.35)
  Top 0.152: v27.6,68.57 26.7,69.46 26.7,71.79 27.06,72.14 27.06,88.23 27.77,88.94 31.53,88.94 32.24,89.66 33.85,89.66 CONN01.7
  Bottom 0.152: v27.6,68.57 28.67,67.5 30.45,67.5 J3.2
I2CM_7  (via drill 0.35)
  Top 0.152: v27.6,66.07 25.99,67.68 25.99,71.61 26.7,72.32 26.7,88.58 27.77,89.66 29.56,89.66 CONN01.8
  Bottom 0.152: v27.6,66.07 28.67,65 30.45,65 J3.1
I2CM_8  (via drill 0.35)
  Top 0.152: v40.82,87.51 36.53,91.8 34.03,91.8 CONN01.9 | v42.25,86.08 42.25,82.15 41.89,81.79 41.89,79.29 42.78,78.4 42.78,74.11 43.14,73.75 43.14,73.22 43.68,72.68 v43.68,67.68
  Bottom 0.152: v42.25,86.08 v40.82,87.51 | v43.68,67.68 45.29,66.07 45.46,66.07 46.54,65 48.32,65 J4.1
I2CM_9  (via drill 0.35)
  Top 0.152: v38.67,85.37 38.67,88.23 36.17,90.73 35.99,90.73 35.81,90.91 32.24,90.91 31.53,91.62 29.74,91.62 CONN01.10 | v42.61,81.44 42.61,81.08 45.29,78.4 45.29,75.54 45.11,75.36 45.11,73.93 45.29,73.75 45.29,73.22 44.93,72.86 v44.93,68.93
  Bottom 0.152: v42.61,81.44 v38.67,85.37 | v44.93,68.93 45.29,68.57 45.46,68.57 46.54,67.5 48.32,67.5 J4.2
I2CM_10  (via drill 0.35)
  Top 0.152: v51.36,71.25 51.36,75.18 50.47,76.07 50.47,81.61 49.4,82.69 49.4,83.76 CONN02.1
  Bottom 0.152: v51.36,71.25 50.11,70 48.5,70 J4.3
I2CM_11  (via drill 0.35)
  Top 0.152: v50.65,73.75 50.65,75.36 50.11,75.9 50.11,76.25 45.29,81.08 45.29,83.76 CONN02.2
  Bottom 0.152: v50.65,73.75 50.65,73.04 50.29,72.68 48.5,72.68 J4.4
I2CM_12  (via drill 0.35)
  Top 0.152: v51.36,78.76 51.72,79.11 51.72,85.37 51.36,85.72 49.57,85.72 CONN02.3
  Bottom 0.152: v51.36,78.76 50.29,77.68 48.5,77.68 J4.6
I2CM_13  (via drill 0.35)
  Top 0.152: v44.75,80.54 42.78,82.51 42.78,85.19 43.32,85.72 45.11,85.72 CONN02.4
  Bottom 0.152: v44.75,80.54 45.29,80.01 48.32,80.01 J4.7
I2CM_15  (via drill 0.35)
  Top 0.152: v43.14,86.8 42.78,87.16 42.78,87.33 43.14,87.69 45.11,87.69 CONN02.6
  Bottom 0.152: v43.14,86.8 43.68,86.8 45.29,85.19 48.32,85.19 J4.9
LED_DEBUG  (via drill 0.35)
  Top 0.152: v19.2,69.28 19.2,71.96 18.12,73.04 18.12,73.22 18.3,73.39 18.3,74.82 17.95,75.18 17.95,89.3 27.06,98.41 27.06,101.27 LED1.4-DIN | v19.2,66.07 24.91,66.07 27.6,63.39 32.96,63.39 33.85,64.28 35.1,64.28 U$1.32
  Bottom 0.152: v19.2,66.07 v19.2,69.28
MA1_01
  Bottom 1.016: CM_01.1 58.51,29.16 MOTOR_01.A1
MA1_02
  Bottom 1.016: MOTOR_02.A1 10.25,28.28 CM_02.1
MA1_03
  Bottom 1.016: CM_03.1 58.51,70.44 MOTOR_03.A1
MA1_04
  Bottom 1.016: MOTOR_04.A1 10.25,69.55 CM_04.1
MA1_05
  Bottom 1.016: CM_05.1 58.51,108.54 MOTOR_05.A1
MA1_06
  Bottom 1.016: CM_06.1 10.25,107.65 MOTOR_06.A1
MA1_07
  Bottom 1.016: MOTOR_07.A1 58.51,150.45 CM_07.1
MA1_08
  Bottom 1.016: CM_08.1 10.25,149.56 MOTOR_08.A1
MA2_01
  Bottom 1.016: CM_01.2 61.05,29.16 MOTOR_01.A2
MA2_02
  Bottom 1.016: MOTOR_02.A2 12.79,28.28 CM_02.2
MA2_03
  Bottom 1.016: CM_03.2 61.05,70.44 MOTOR_03.A2
MA2_04
  Bottom 1.016: CM_04.2 12.79,69.55 MOTOR_04.A2
MA2_05
  Bottom 1.016: CM_05.2 61.05,108.54 MOTOR_05.A2
MA2_06
  Bottom 1.016: CM_06.2 12.79,107.65 MOTOR_06.A2
MA2_07
  Bottom 1.016: CM_07.2 57.69,153 59.86,150.83 59.86,147.39 MOTOR_07.A2
MA2_08
  Bottom 1.016: CM_08.2 12.79,149.56 MOTOR_08.A2
MB1_01
  Bottom 1.016: CM_01.4 66.13,29.16 MOTOR_01.B1
MB1_02
  Bottom 1.016: MOTOR_02.B1 17.87,28.28 CM_02.4
MB1_03
  Bottom 1.016: CM_03.4 66.13,70.44 MOTOR_03.B1
MB1_04
  Bottom 1.016: CM_04.4 17.87,69.55 MOTOR_04.B1
MB1_05
  Bottom 1.016: MOTOR_05.B1 64.94,106.75 64.94,108.65 62.77,110.82 CM_05.4
MB1_06
  Bottom 1.016: CM_06.4 17.87,107.65 MOTOR_06.B1
MB1_07
  Bottom 1.016: MOTOR_07.B1 64.94,147.39 64.94,149.29 62.77,151.46 CM_07.4
MB1_08
  Bottom 1.016: CM_08.4 17.87,149.56 MOTOR_08.B1
MB2_01
  Bottom 1.016: CM_01.3 63.59,29.16 MOTOR_01.B2
MB2_02
  Bottom 1.016: MOTOR_02.B2 15.33,28.28 CM_02.3
MB2_03
  Bottom 1.016: CM_03.3 63.59,70.44 MOTOR_03.B2
MB2_04
  Bottom 1.016: CM_04.3 15.33,69.55 MOTOR_04.B2
MB2_05
  Bottom 1.016: MOTOR_05.B2 63.59,108.27 61.55,110.32 61.55,110.59 CM_05.3
MB2_06
  Bottom 1.016: CM_06.3 15.33,107.65 MOTOR_06.B2
MB2_07
  Bottom 1.016: MOTOR_07.B2 62.4,147.39 62.4,150.02 60.23,152.19 CM_07.3
MB2_08
  Bottom 1.016: CM_08.3 15.33,149.56 MOTOR_08.B2
MDIR_01  (via drill 0.35)
  Top 0.152: v53.51,56.24 50.47,59.28 47.97,59.28 U$1.6 | v54.04,38.55 54.04,33.55 52.79,32.29 v52.79,14.6
  Bottom 0.152: v53.51,56.24 52.08,54.81 52.08,40.51 v54.04,38.55 | v52.79,14.6 52.79,10.85 53.33,10.31 MOTOR_01.DIR
MDIR_02  (via drill 0.35)
  Top 0.152: v44.57,59.99 44.57,62.32 45.29,63.03 45.64,63.03 46.89,64.28 47.79,64.28 U$1.8 | v41.18,53.74 41.18,46.59 36.89,42.3 v34.38,42.3 | v32.96,40.87 32.24,40.16 13.66,40.16 v5.97,32.47
  Bottom 0.152: v44.57,59.99 44.57,57.13 v41.18,53.74 | v32.96,40.87 v34.38,42.3 | v5.97,32.47 5.97,31.4 3.83,29.26 3.83,11.57 5.08,10.31 MOTOR_02.DIR
MDIR_03  (via drill 0.35)
  Top 0.152: v52.79,54.45 52.79,55.7 50.47,58.03 45.46,58.03 43.86,59.64 43.86,66.78 45.29,68.21 45.64,68.21 46.89,69.46 47.79,69.46 U$1.10
  Bottom 0.152: v52.79,54.45 53.51,53.74 53.51,51.06 MOTOR_03.DIR
MDIR_04  (via drill 0.35)
  Top 0.152: v26.7,68.03 27.24,67.5 27.6,67.5 28.31,68.21 28.31,68.39 29.38,69.46 29.92,69.46 U$1.15/A1 | v24.91,67.85 19.91,67.85 v6.33,54.27
  Bottom 0.152: v26.7,68.03 26.52,67.85 v24.91,67.85 | v6.33,54.27 6.33,52.13 5.26,51.06 MOTOR_04.DIR
MDIR_05  (via drill 0.35)
  Top 0.152: v23.31,84.3 26.34,81.26 26.34,74.29 25.63,73.57 25.63,66.6 27.77,64.46 29.92,64.46 U$1.17/A3 | v23.31,86.8 23.31,88.41 27.77,92.87 31.71,92.87 32.06,92.52 32.42,92.87 34.03,92.87 34.21,92.69 34.38,92.87 35.46,92.87 35.81,92.52 39.75,96.45 v45.11,96.45
  Bottom 0.152: v23.31,86.8 v23.31,84.3 | v45.11,96.45 48.68,96.45 53.33,91.8 53.33,90.37 MOTOR_05.DIR
MDIR_06  (via drill 0.35)
  Top 0.152: v28.13,53.02 29.38,54.27 29.92,54.27 U$1.21/A7 | v23.84,54.45 v26.7,54.45 | v11.51,69.11 11.51,71.43 v4.01,78.94
  Bottom 0.152: v26.7,54.45 v28.13,53.02 | v23.84,54.45 20.62,54.45 11.51,63.57 v11.51,69.11 | v4.01,78.94 4.01,89.12 5.08,90.19 MOTOR_06.DIR
MDIR_07  (via drill 0.35)
  Top 0.152: v28.13,47.84 29.38,49.09 29.92,49.09 U$1.23/A9 | v26.7,49.27 9.19,49.27 2.4,56.06 2.4,84.65 28.67,110.92 28.67,112.53 27.95,113.24 27.24,113.24 26.52,113.96 26.52,117.71 38.67,129.86 v46.89,129.86
  Bottom 0.152: v26.7,49.27 v28.13,47.84 | v46.89,129.86 52.79,129.86 53.33,130.4 53.33,130.94 MOTOR_07.DIR
MDIR_08  (via drill 0.35)
  Top 0.152: v37.78,68.57 37.6,68.39 37.6,66.07 37.96,65.71 38.32,65.71 39.57,64.46 40.1,64.46 U$1.25 | v32.06,76.25 30.63,76.25 v28.13,78.76 | v21.88,80.36 21.88,86.08 v19.2,88.76 | v5.26,127.54 v3.47,125.75
  Bottom 0.152: v37.78,68.57 37.78,72.32 33.85,76.25 v32.06,76.25 | v28.13,78.76 27.95,78.94 23.31,78.94 v21.88,80.36 | v19.2,88.76 19.2,92.87 16.34,95.73 10.62,95.73 4.18,102.17 4.18,111.81 4.72,112.35 4.72,123.43 3.47,124.68 v3.47,125.75 | v5.26,127.54 5.26,130.94 MOTOR_08.DIR
MENABLE  (via drill 0.35)
  Top 0.152: v73.88,26.57 73.88,28.36 72.45,29.79 v72.45,48.2 v72.45,88.05 72.45,132.55 v70.48,134.51 v64.05,140.94 | v24.38,61.42 25.99,63.03 33.49,63.03 34.56,61.96 35.1,61.96 U$1.33 | v18.66,79.65 18.66,76.97 20.8,74.82 v20.8,70.89 | v6.87,141.3 9.01,141.3 v9.72,140.59
  Bottom 0.152: MOTOR_02.ENA 23.13,10.13 49.22,10.13 52.61,6.74 69.05,6.74 71.2,8.88 71.2,10.13 MOTOR_01.ENA 71.38,10.31 73.88,12.82 v73.88,26.57 | v72.45,48.2 71.38,49.27 71.38,50.88 MOTOR_03.ENA | v72.45,88.05 71.38,89.12 71.38,90.19 MOTOR_05.ENA | v24.38,61.42 24.38,60.53 24.56,60.35 24.56,59.28 | 24.56,59.28 24.56,52.49 23.13,51.06 MOTOR_04.ENA | v18.66,79.65 18.66,83.22 22.95,87.51 22.95,90.19 MOTOR_06.ENA 22.95,90.37 22.95,91.62 18.48,96.09 13.3,96.09 6.15,103.24 6.15,110.92 5.08,111.99 5.08,125.57 4.54,126.11 4.54,127.72 4.18,128.08 4.18,138.62 v6.87,141.3 | v20.8,70.89 20.8,69.64 21.52,68.93 21.52,61.78 23.13,60.17 23.13,59.64 23.49,59.28 24.56,59.28 | 21.88,140.59 21.88,148.99 22.23,149.34 46.36,149.34 54.76,140.94 v64.05,140.94 | 21.88,140.59 21.88,135.23 22.95,134.15 22.95,131.12 MOTOR_08.ENA | v70.48,134.51 71.2,133.8 71.2,131.12 MOTOR_07.ENA | 21.88,140.59 v9.72,140.59
MMS1  (via drill 0.35)
  Top 0.152: v67.44,53.56 65.3,53.56 64.76,54.1 64.76,55.88 50.29,70.36 50.29,70.54 48.86,71.96 47.97,71.96 U$1.11 | v67.44,53.56 v67.44,88.05 v67.44,128.26 | v12.76,79.65 v9.55,76.43 | v20.45,39.44 20.45,36.4 23.66,33.19 v23.66,16.39 | v67.44,53.56 67.44,30.15 v72.45,25.15
  Bottom 0.152: v67.44,53.56 68.52,52.49 68.52,51.06 MOTOR_03.MS1 | v67.44,88.05 68.52,89.12 68.52,90.19 MOTOR_05.MS1 | v67.44,128.26 68.52,129.33 68.52,130.94 MOTOR_07.MS1 | v9.55,76.43 9.19,76.07 9.19,63.39 9.55,63.03 10.44,63.03 20.27,53.2 20.27,51.06 MOTOR_04.MS1 20.45,50.88 v20.45,39.44 | v12.76,79.65 12.76,81.26 20.27,88.76 20.27,90.19 MOTOR_06.MS1 | 23.66,13.53 46.36,13.53 52.79,7.1 66.91,7.1 68.52,8.71 68.52,10.13 MOTOR_01.MS1 68.7,10.31 68.7,11.74 72.45,15.5 v72.45,25.15 | 23.66,13.53 22.23,13.53 20.45,11.74 20.45,10.31 MOTOR_02.MS1 | 23.66,13.53 v23.66,16.39
MMS2  (via drill 0.35)
  Top 0.152: 51.18,70 65.48,55.7 v65.48,54.45 | 51.18,70 50.65,70.54 50.65,71.61 50.83,71.79 50.83,72.86 50.65,73.04 50.29,73.04 48.86,74.47 47.97,74.47 U$1.12 | 51.18,70 52.08,70.89 52.08,72.86 65.48,86.26 v65.48,86.8 66.19,87.51 v66.19,127.54 | v17.95,39.44 17.95,38.37 v19.2,37.12 | v66.19,47.48 66.19,21.93 v61.01,16.75
  Bottom 0.152: v65.48,54.45 66.19,53.74 66.19,51.06 MOTOR_03.MS2 66.19,50.88 v66.19,47.48 | v65.48,86.8 66.02,87.33 66.02,90.19 MOTOR_05.MS2 | v66.19,127.54 66.19,130.94 MOTOR_07.MS2 | 23.31,17.1 17.95,11.74 17.95,10.31 MOTOR_02.MS2 | 23.31,17.1 60.65,17.1 v61.01,16.75 66.02,11.74 66.02,10.31 MOTOR_01.MS2 | v17.95,39.44 17.95,50.88 MOTOR_04.MS2 | v19.2,37.12 23.31,33.01 23.31,29.79 21.88,28.36 21.88,22.46 | 21.88,22.46 21.88,18.53 23.31,17.1 | 21.88,22.46 4.36,22.46 4.18,22.64 4.18,29.08 6.69,31.58 6.69,32.83 4.72,34.8 4.72,38.91 3.83,39.8 3.83,68.75 5.08,70 5.08,78.76 5.62,79.29 9.01,79.29 17.77,88.05 17.77,90.19 MOTOR_06.MS2
MSTEP_01  (via drill 0.35)
  Top 0.152: v44.75,56.24 45.29,56.78 47.79,56.78 U$1.5 | v44.75,54.81 44.75,52.84 44.57,52.67 44.57,43.73 45.46,42.84 50.47,42.84 50.83,42.48 v50.83,37.48 | v51.9,16.39 v51.9,36.4
  Bottom 0.152: v44.75,54.81 v44.75,56.24 | v51.9,36.4 v50.83,37.48 | v51.9,16.39 52.97,15.32 53.15,15.32 55.83,12.64 55.83,10.31 MOTOR_01.STEP
MSTEP_02  (via drill 0.35)
  Top 0.152: v47.97,60.53 47.97,61.78 U$1.7 | v43.14,51.95 43.14,48.02 36.71,41.59 v35.1,41.59 | v33.67,40.16 29.56,36.05 29.38,36.05 24.38,31.04 24.38,16.03 24.02,15.67 22.95,15.67 v21.88,16.75
  Bottom 0.152: v47.97,60.53 47.97,56.78 v43.14,51.95 | v33.67,40.16 v35.1,41.59 | v21.88,16.75 12.76,16.75 7.76,11.74 7.76,10.31 MOTOR_02.STEP
MSTEP_03  (via drill 0.35)
  Top 0.152: v57.26,53.74 57.26,58.74 50.29,65.71 50.11,65.71 48.86,66.96 47.97,66.96 U$1.9
  Bottom 0.152: v57.26,53.74 56.01,52.49 56.01,51.06 MOTOR_03.STEP
MSTEP_04  (via drill 0.35)
  Top 0.152: v28.13,76.25 27.77,75.9 27.77,73.75 29.38,72.14 29.92,72.14 U$1.14/A0 | v6.87,55.88 v25.63,74.65
  Bottom 0.152: v28.13,76.25 27.95,76.43 27.42,76.43 v25.63,74.65 | v6.87,55.88 6.87,54.81 7.58,54.1 7.58,51.06 MOTOR_04.STEP
MSTEP_05  (via drill 0.35)
  Top 0.152: v39.21,83.76 37.6,82.15 37.6,71.43 37.24,71.07 37.07,71.07 36.89,70.89 33.13,70.89 32.42,70.18 32.42,68.57 30.99,67.14 30.1,67.14 U$1.16/A2 | v34.38,95.02 35.64,95.02 41.71,101.09 41.71,105.02 42.25,105.56 44.75,105.56 45.82,104.49 45.82,103.59 46.18,103.24 46.36,103.24 46.54,103.06 47.43,103.06 47.61,102.88 47.79,102.88 56.54,94.12 v56.54,93.77
  Bottom 0.152: v39.21,83.76 34.38,88.58 v34.38,95.02 | v56.54,93.77 55.83,93.05 55.83,90.37 MOTOR_05.STEP
MSTEP_06  (via drill 0.35)
  Top 0.152: v3.11,56.42 5.97,53.56 6.69,53.56 9.9,56.78 29.92,56.78 U$1.20/A6
  Bottom 0.152: v3.11,56.42 3.11,75.18 4.72,76.79 4.72,85.9 7.58,88.76 7.58,90.19 MOTOR_06.STEP
MSTEP_07  (via drill 0.35)
  Top 0.152: v28.13,50.34 29.38,51.59 29.92,51.59 U$1.22/A8 | v26.7,51.77 20.62,51.77 v19.2,53.2 | v7.94,76.25 7.94,89.66 29.02,110.74 29.02,112.71 28.67,113.07 28.67,113.42 29.2,113.96 29.02,114.14 29.02,115.21 28.67,115.57 28.67,115.93 29.02,116.28 29.02,116.46 28.85,116.64 28.85,116.82 32.06,120.04 v46.89,120.04
  Bottom 0.152: v26.7,51.77 v28.13,50.34 | v19.2,53.2 19.2,53.56 10.08,62.67 9.37,62.67 8.65,63.39 8.65,75.54 v7.94,76.25 | v46.89,120.04 55.83,128.97 55.83,130.94 MOTOR_07.STEP
MSTEP_08  (via drill 0.35)
  Top 0.152: v20.98,60.71 36.71,60.71 37.07,61.07 37.42,61.07 38.14,61.78 40.1,61.78 U$1.24 | v14.01,69.11 14.01,70.89 8.65,76.25 v8.65,80.01 | v3.47,111.81 3.47,119.68 6.87,123.07 v6.87,125.4
  Bottom 0.152: v20.98,60.71 16.87,60.71 14.01,63.57 v14.01,69.11 | v8.65,80.01 8.65,97.16 3.47,102.34 v3.47,111.81 | v6.87,125.4 7.58,126.11 7.58,130.94 MOTOR_08.STEP
MUX_RESET
  Bottom 0.152: J1.2 43.32,59.99 43.32,66.25 39.03,70.54 39.03,76.79 43.32,81.08 43.32,83.94 40.1,87.16 40.1,87.87 43.14,90.91 43.14,92.69 J2.2
MUX_S2  (via drill 0.35)
  Top 0.152: v51.72,65.89 58.33,59.28 58.33,43.91 49.93,35.51 48.86,35.51 48.68,35.69 48.68,36.76 U1.14 | v41.89,70.71 41.89,71.43 41.35,71.96 40.28,71.96 U$1.28
  Bottom 0.152: v51.72,65.89 51.36,66.25 45.82,66.25 45.64,66.43 45.46,66.43 44.39,67.5 44.39,68.21 v41.89,70.71
MUX_S3  (via drill 0.35)
  Top 0.152: v40.64,55.53 43.86,52.31 43.86,41.77 45.29,40.34 47.07,40.34 49.4,38.01 49.4,36.94 U1.13 | v39.39,63.03 38.14,63.03 37.6,63.57 37.6,65 35.64,66.96 35.28,66.96 U$1.31
  Bottom 0.152: v40.64,55.53 39.39,56.78 v39.39,63.03
MUX_SCL  (via drill 0.35)
  Top 0.152: v31.88,58.21 30.81,59.28 30.1,59.28 U$1.19/A5 29.92,59.46 27.77,59.46 27.24,59.99 v23.84,59.99 | v27.6,90.73 24.02,87.16 24.02,86.08 22.59,84.65 22.59,75.54 23.66,74.47 23.66,73.22 22.23,71.79 v21.7,71.79
  Bottom 0.152: v31.88,58.21 32.6,58.21 32.96,58.56 32.96,59.81 J1.6 | v27.6,90.73 29.74,92.87 32.96,92.87 J2.6 | v21.7,71.79 21.7,69.28 21.88,69.11 21.88,61.96 v23.84,59.99
MUX_SDA  (via drill 0.35)
  Top 0.152: v27.42,61.96 29.92,61.96 U$1.18/A4 | v40.28,84.83 40.28,73.39 40.64,73.04 41.18,73.04 41.35,73.22 42.07,73.22 42.61,72.68 42.61,68.57 42.25,68.21 v38.85,68.21
  Bottom 0.152: v27.42,61.96 30.81,61.96 32.42,63.57 33.85,63.57 34.03,63.39 | 34.03,63.39 34.38,63.03 34.38,62.85 35.64,61.6 35.64,59.99 J1.5 | v40.28,84.83 39.03,86.08 38.85,86.08 35.64,89.3 35.64,92.69 J2.5 | 34.03,63.39 v38.85,68.21
MUX_SIG  (via drill 0.35)
  Top 0.152: v38.49,29.61 42.07,29.61 U1.1 | v37.07,31.04 36.35,31.04 35.46,30.15 33.31,30.15 32.78,30.69 32.78,38.19 34.38,39.8 34.38,40.51 32.06,42.84 27.95,42.84 27.42,43.37 27.42,55.17 27.77,55.53 33.13,55.53 34.38,56.78 35.1,56.78 U$1.A13
  Bottom 0.152: v37.07,31.04 v38.49,29.61
N$1
  Top 0.152: POWER_LED_M.1 19.55,118.43 19.55,122 POWER_LED_RES.1
N$2  (via drill 0.35)
  Top 0.152: v19.55,124.68 10.8,124.68 10.62,124.86 10.08,124.86 U$2.VCAPH | v21.16,126.29 19.37,128.08 18.84,128.08 18.12,128.79 18.12,129.69 C14.2
  Bottom 0.152: v21.16,126.29 v19.55,124.68
N$4  (via drill 0.35)
  Top 0.152: v6.87,126.47 9.01,124.32 9.9,124.32 U$2.GDRIVE | v5.26,126.47 4.72,126.47 4.18,125.93 4.18,125.4 4.36,125.22 | 4.36,125.22 4.72,124.86 5.44,124.86 U$2.GPD | v6.51,149.34 10.08,145.77 10.08,145.23 U$4.1 | 4.36,125.22 v4.18,125.04
  Bottom 0.152: v5.26,126.47 v6.87,126.47 | v6.51,149.34 6.51,142.02 3.83,139.34 3.83,126.47 4.18,126.11 v4.18,125.04
N$5  (via drill 0.35)
  Top 0.152: v8.65,140.59 4.18,140.59 3.65,140.05 3.65,130.04 4.01,129.69 4.18,129.69 5.97,127.9 5.97,125.93 5.62,125.57 U$2.VCAPL | v11.87,134.33 11.87,132.37 14.37,129.86 15.09,129.86 C14.1
  Bottom 0.152: v8.65,140.59 8.65,137.55 v11.87,134.33
N$6
  Top 0.152: TCAN1042.8 52.43,104.85 52.79,104.85 53.51,104.13 53.51,100.74 52.97,100.2 51.72,100.2 47.97,103.95 47.97,104.13 47.61,104.49 47.43,104.49 47.25,104.31 46.54,104.31 44.93,105.92 41.71,105.92 40.28,104.49 39.57,104.49 CAN_RST.1
N$7
  Top 0.152: POWER_LED_RES1.1 39.92,109.49 39.92,113.6 39.57,113.96 POWER_LED_MCU.1
N$9  (via drill 0.35)
  Top 0.152: v14.01,131.83 14.19,132.01 14.19,133.26 C12.2 | v17.23,134.51 18.3,133.44 19.02,133.44 C13.1
  Bottom 0.152: v14.01,131.83 14.01,133.62 14.91,134.51 v17.23,134.51
N$12
  Top 0.152: D1.A 22.95,134.51 22.95,136.83 20.98,138.8 20.98,141.84 22.95,143.8 22.95,144.52 D2.A
N$193
  Top 0.152: CAN_LED_R.1 42.96,109.49 42.96,112.17 44.39,113.6 44.39,113.96 CAN_LED.1
NEO_PIXEL  (via drill 0.35)
  Top 0.152: v49.75,81.26 48.86,81.26 47.25,82.87 47.43,83.05 47.43,84.47 47.25,84.65 47.25,84.83 47.43,85.01 47.43,86.44 47.25,86.62 47.25,86.8 47.43,86.98 47.43,88.41 48.68,89.66 49.4,89.66 CONN02.7 | v50.83,53.92 50.83,50.88 50.29,50.34 50.11,50.34 49.04,49.27 47.97,49.27 U$1.2
  Bottom 0.152: v49.75,81.26 51.72,81.26 52.79,80.19 52.79,69.82 52.43,69.46 52.43,68.93 52.08,68.57 52.08,66.6 52.43,66.25 52.43,65.53 52.08,65.17 52.08,55.35 50.83,54.1 v50.83,53.92
REG_5V
  Top 0.457: S1.6 22.95,116.74 22.95,123.34 20.78,125.51 U$2.CATHODE 9.91,132.88 U$4.4 11.21,138.58 15.19,138.58 C15.+
S_SCL  (via drill 0.35)
  Top 0.152: v47.25,90.73 47.25,90.91 46.54,91.62 45.29,91.62 CONN02.10 | v42.07,88.23 42.07,87.69 35.28,80.9 35.28,72.14 U$1.29
  Bottom 0.152: v47.25,90.73 47.25,89.83 46.36,88.94 42.78,88.94 v42.07,88.23
S_SDA  (via drill 0.35)
  Top 0.152: v51.18,76.43 52.08,77.33 52.08,90.91 51.36,91.62 49.57,91.62 CONN02.9 | v39.75,70.89 37.6,70.89 37.42,70.71 37.24,70.71 36.17,69.64 35.28,69.64 U$1.30
  Bottom 0.152: v51.18,76.43 51,76.25 45.11,76.25 v39.75,70.89
S_SEN_01  (via drill 0.35)
  Top 0.152: v52.08,73.93 52.43,74.29 52.43,91.8 51.54,92.69 51.36,92.69 51.18,92.87 49.93,92.87 49.75,92.69 49.57,92.69 49.4,92.87 43.68,92.87 43.14,92.34 43.14,91.09 44.39,89.83 45.11,89.83 CONN02.8 | v51,68.57 51,65.53 57.97,58.56 57.97,53.38 57.62,53.02 52.79,53.02 50.29,55.53 43.68,55.53 42.25,56.96 40.28,56.96 U$1.A12
  Bottom 0.152: v52.08,73.93 52.08,69.28 51.36,68.57 v51,68.57
VCC_5V  (via drill 0.35)
  Top 0.457: S1.3 35.98,109.37 POWER_LED_RES1.2 | POWER_LED_RES1.2 35.65,108.48 C2.1 34.7,104.42 LED1.1-VDD 31.65,95.72 CONN01.11 26.82,96.67 v26.76,96.67 | v40.73,106.83 38.19,106.83 36.54,108.48 POWER_LED_RES1.2 | U$1.VIN 13.28,41.57 v10.25,44.6
  Bottom 0.457: v40.73,106.83 50.66,106.83 52.62,108.78 54.25,108.78 54.5,108.53 54.5,107.03 MOTOR_05.FAULT 55.97,94.36 54.91,93.29 54.91,75.44 53.82,74.35 53.82,73.26 55.97,71.11 MOTOR_03.FAULT 55.97,54.99 54.91,53.92 54.91,34.16 53.82,33.08 53.82,31.98 55.97,29.83 MOTOR_01.FAULT | 21.68,96.67 15.1,96.67 9.19,102.58 9.19,104.09 MOTOR_06.FAULT 7.71,110.22 5.64,112.3 5.64,122.95 8.78,126.09 8.78,133.93 7.71,135 MOTOR_08.FAULT 7.71,153.82 10.25,156.36 47.32,156.36 54.5,149.17 54.5,147.67 MOTOR_07.FAULT | 21.68,96.67 v26.76,96.67 | 21.68,96.67 24.22,94.13 24.22,83.97 19.01,78.75 5.89,78.75 5.64,78.5 5.64,76.74 7.71,74.66 MOTOR_04.FAULT 7.71,54.99 8.78,53.92 8.78,45.87 | MOTOR_02.FAULT 7.71,35.29 5.64,37.37 5.64,39.13 8.78,42.27 8.78,45.87 | v10.25,44.6 8.98,45.87 8.78,45.87
VCC_IN
  Bottom 0.152: INPUT_POWER_1.VCC_02 33.13,125.93 33.13,128.61 34.38,129.86 44.39,129.86 45.64,128.61 45.64,125.93 INPUT_POWER_1.VCC_01
VCC_M  (via drill 0.35)
  Top 1.016: POWER_LED_RES.2 v11.52,122.07
  Bottom 1.016: C5.+ 20.41,38.25 | 20.41,38.25 25.49,33.17 25.49,28.09 MOTOR_02.VM 30.57,17.93 65.49,17.93 70.02,22.46 70.02,24.36 MOTOR_01.VM 73.61,27.95 C4.+ 73.61,63.79 MOTOR_03.VM 71.21,70 73.75,72.54 73.61,72.68 C7.+ 73.61,103.16 MOTOR_05.VM 71.21,109.37 73.75,111.91 73.75,113.04 C8.+ C10.+ 73.61,143.8 MOTOR_07.VM 70.02,145 70.02,143.11 66.76,139.85 47.08,139.85 45.1,137.87 POWER_M.1 36.21,146.2 MOTOR_08.VM 22.95,135.39 24.3,134.05 24.3,127.87 23.88,127.45 12.96,127.45 C11.+ | 20.41,38.25 22.95,38.25 25.49,40.79 25.49,63.65 MOTOR_04.VM 22.95,72.37 23.73,73.14 23.73,74.47 20.58,77.62 C6.+ | C11.+ C9.+ 13.51,113.18 13.84,113.51 22.79,113.51 23.73,112.57 23.73,111.24 22.95,110.47 MOTOR_06.VM | v11.52,122.07 C11.+
VCC_MCU
  Top 0.457: POWER_MCU.1 29.86,135.33 24.61,130.08 D1.C 20.12,130.08 17.81,132.39 17.81,132.42 C12.1 15.95,138.05 17.48,138.05 17.74,138.31 17.74,141.67 17.48,141.92 8.31,141.92 5.17,145.06 | 5.17,145.06 U$4.3 | U$2.ANODE 3.68,123.56 2.63,124.61 2.63,142.52 5.17,145.06

## Text on the board
tPlace: CAN | MOTOR | 8 | 7 | POWER | CAN | ON | Debug | 6 | 5 | OSC | 4 | 3 | 2 | 1
bPlace: !INT | !RST | GND | 3V3 | SDA | SCL | GND | GND | GND | GND | 0 | 15 | 1 | 14 | 2 | 13 | 3 | 12 | VC1 | VC2 | 4 | 11 | 5 | 10 | 6 | 9 | 7 | 8 | !RST | GND | 3.3V | SDA | SCL
tNames: IN | - | IN | MCU